# Altium PCB Lite Carrier for Mu.PcbDoc (part 15 of 15)
Units mm, origin at the board's own origin, x right, y up, seen from the top; angles counter-clockwise.
Board outline 146 x 102 mm, 20 copper layers (F.Cu, F.Mask, B.Cu, B.Mask, In1.Cu, F.SilkS, In2.Cu, B.SilkS, F.Adhes, B.Adhes, F.Paste, B.Paste, Dwgs.User, Cmts.User, Eco1.User, Eco2.User, Edge.Cuts, Margin, B.CrtYd, F.CrtYd); 254 components, 382 nets, 1258 pads, 1020 vias.
Unrouted connection lines stored in the file: 113.
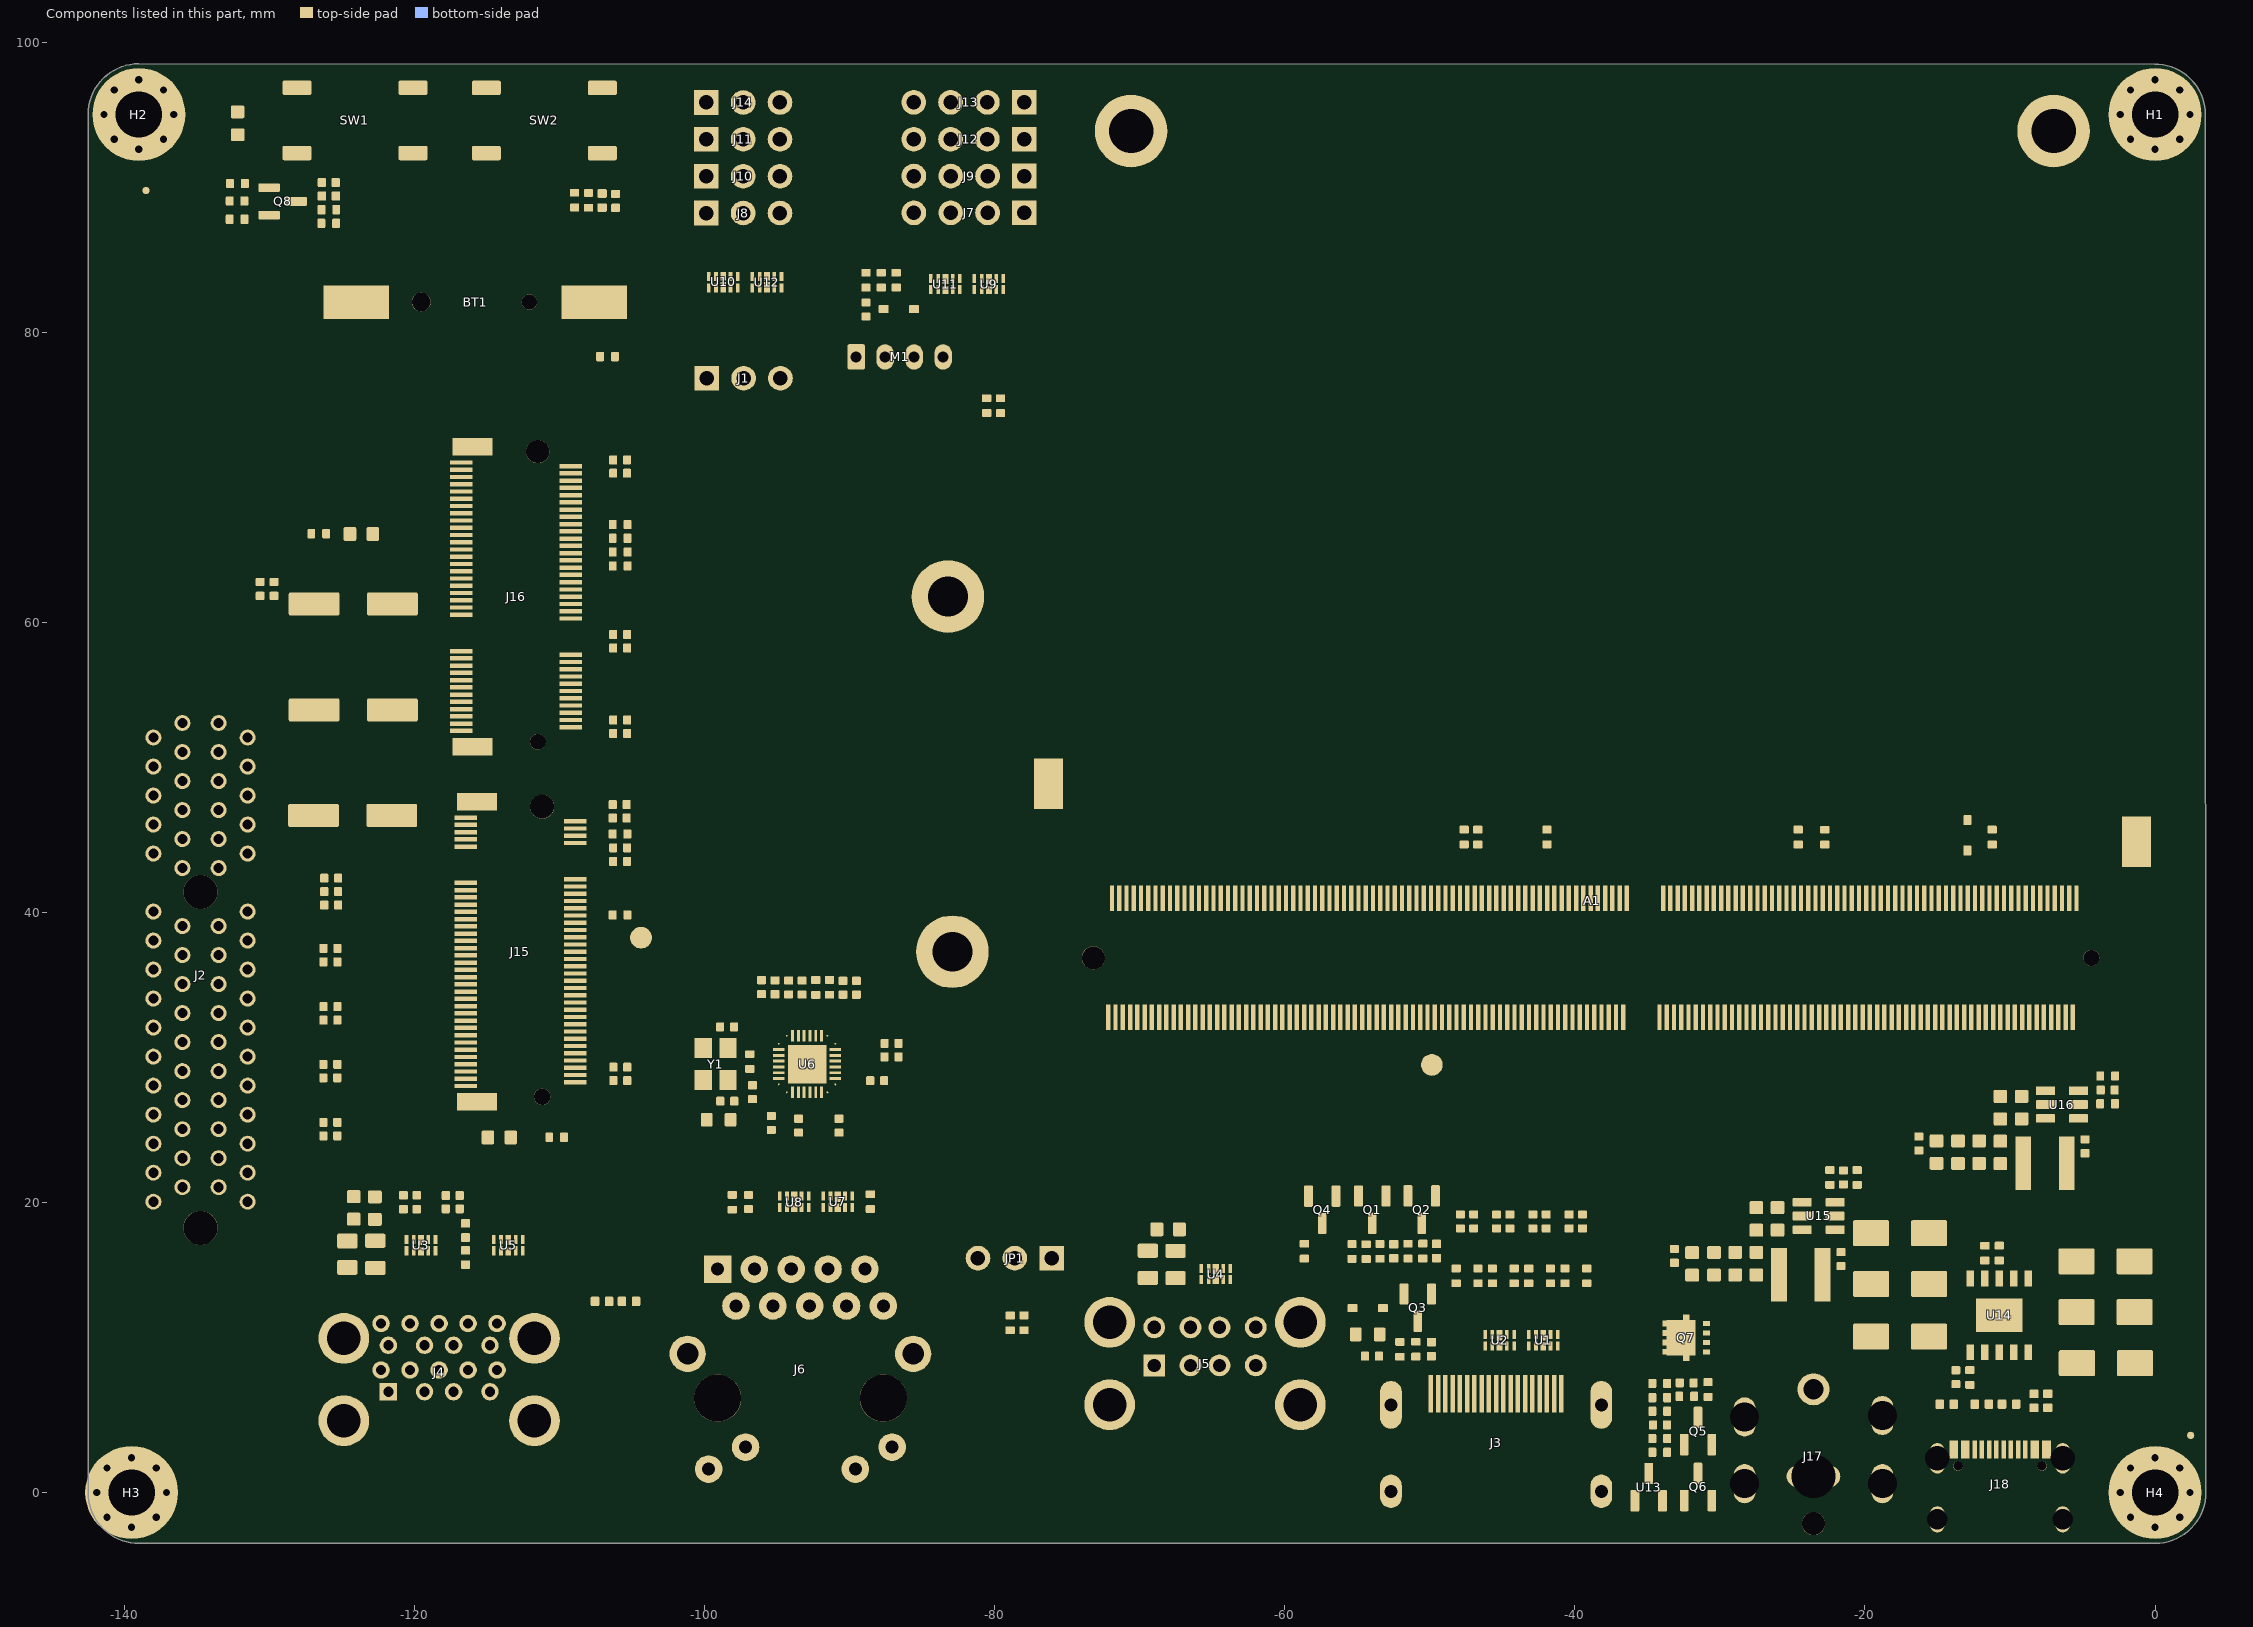
[diagram p25: the components of this part, seen from the top]

## Polygon pours and split planes (outlines as drawn) (continued)
PWR_EN on B.Cu "B.Cu-/PSU/PWR_EN" (solid, remove dead copper, pour order 31010): 24 vertices, not listed, extent -78.693,5.999 -77.307,7.25
Net-(A1-{\B\I\O\S\_\S\E\L\}\)\ on B.Cu "B.Cu-Net-(A1-~{BIOS_SEL})" (solid, remove dead copper, pour order 31013): 24 vertices, not listed, extent -40.601,38.187 -39.39,39.573
Net-(JP1-C) on B.Cu "B.Cu-Net-(JP1-C)-1" (solid, remove dead copper, pour order 31016): 24 vertices, not listed, extent -79.211,14.81 -78.009,16.161
I2C3_SCL on B.Cu "B.Cu-/GPIO/I2C3_SCL-1" (solid, remove dead copper, pour order 31019): 24 vertices, not listed, extent -81.498,89.752 -80.489,90.761
FAN_1_PWM on B.Cu "B.Cu-/Fan_Temp/FAN_1_PWM" (solid, remove dead copper, pour order 31022): 24 vertices, not listed, extent -79.287,74.978 -78.25,76.001
CON_USB3_SSTX_N on B.Cu "B.Cu-/USB2.0&USB3.0/CON_USB3_SSTX_N-1" (solid, remove dead copper, pour order 31025): 24 vertices, not listed, extent -120.937,8.449 -119.876,9.449
CON_USB3_SSTX_P on B.Cu "B.Cu-/USB2.0&USB3.0/CON_USB3_SSTX_P" (solid, remove dead copper, pour order 31028): 24 vertices, not listed, extent -122.53,8.22 -121.462,9.288
HSIO_11_RX- on B.Cu "B.Cu-/LattePanda Module/HSIO_11_RX-" (solid, remove dead copper, pour order 31031): 24 vertices, not listed, extent -131.71,21.84 -130.752,22.863
HSIO_8_RX+ on B.Cu "B.Cu-/LattePanda Module/HSIO_8_RX+" (solid, remove dead copper, pour order 31034): 24 vertices, not listed, extent -132.566,35.542 -131.499,36.558
{\W\A\K\E\}\ on B.Cu "B.Cu-/~{WAKE}-3" (solid, remove dead copper, pour order 31037): 24 vertices, not listed, extent -136.21,42.84 -135.187,43.863
{\P\L\T\_\R\S\T\}\ on B.Cu "B.Cu-/~{PLT_RST}-1" (solid, remove dead copper, pour order 31040): 24 vertices, not listed, extent -133.71,42.237 -132.687,43.26
HSIO_9_RX+ on B.Cu "B.Cu-/LattePanda Module/HSIO_9_RX+" (solid, remove dead copper, pour order 31043): 24 vertices, not listed, extent -133.501,30.542 -132.45,31.558
HSIO_11_RX+ on B.Cu "B.Cu-/LattePanda Module/HSIO_11_RX+" (solid, remove dead copper, pour order 31046): 24 vertices, not listed, extent -133.501,22.542 -132.45,23.558
HSIO_8_RX- on B.Cu "B.Cu-/LattePanda Module/HSIO_8_RX--1" (solid, remove dead copper, pour order 31049): 24 vertices, not listed, extent -133.501,34.542 -132.45,35.558
HSIO_10_RX+ on B.Cu "B.Cu-/LattePanda Module/HSIO_10_RX+" (solid, remove dead copper, pour order 31052): 24 vertices, not listed, extent -133.501,26.542 -132.45,27.558
VPullup on B.Cu "B.Cu-VPullup" (solid, remove dead copper, pour order 31055): 24 vertices, not listed, extent -13.53,46.98 -12.47,48.001
CON_USB3_SSRX_N on B.Cu "B.Cu-/USB2.0&USB3.0/CON_USB3_SSRX_N-1" (solid, remove dead copper, pour order 31058): 24 vertices, not listed, extent -115.24,8.22 -114.299,9.136
CON_USB3_SSRX_P on B.Cu "B.Cu-/USB2.0&USB3.0/CON_USB3_SSRX_P" (solid, remove dead copper, pour order 31061): 24 vertices, not listed, extent -116.53,8.449 -115.643,9.239
HSIO_10_RX- on B.Cu "B.Cu-/LattePanda Module/HSIO_10_RX-" (solid, remove dead copper, pour order 31064): 24 vertices, not listed, extent -132.546,25.661 -131.499,26.558
HSIO_9_RX- on B.Cu "B.Cu-/LattePanda Module/HSIO_9_RX-" (solid, remove dead copper, pour order 31067): 24 vertices, not listed, extent -132.3,29.661 -131.499,30.558
FAN_1_TAC on B.Cu "B.Cu-/Fan_Temp/FAN_1_TAC-1" (solid, remove dead copper, pour order 31070): 24 vertices, not listed, extent -86.652,81.59 -86.059,82.37
+3V3 on B.Cu "B.Cu-+3V3-8" (solid, remove dead copper, pour order 31073): 24 vertices, not listed, extent -2.541,28.579 -2.029,29.091
CC2 on B.Cu "B.Cu-/PSU/CC2" (solid, remove dead copper, pour order 31076): 24 vertices, not listed, extent -9.071,5.709 -8.559,6.221
CC2 on B.Cu "B.Cu-/PSU/CC2-1" (solid, remove dead copper, pour order 31079): 24 vertices, not listed, extent -8.891,13.419 -8.379,13.931
+3V3 on B.Cu "B.Cu-+3V3-6" (solid, remove dead copper, pour order 31082): 24 vertices, not listed, extent -79.326,73.91 -78.942,74.306
+3V3 on B.Cu "B.Cu-+3V3-10" (solid, remove dead copper, pour order 31085): 24 vertices, not listed, extent -53.097,18.459 -52.707,18.91
DDI_B_HPD on B.Cu "B.Cu-/HDMI/DDI_B_HPD-1" (solid, remove dead copper, pour order 31088): 24 vertices, not listed, extent -27.34,30.625 -26.939,30.995
DDI_B_HPD on B.Cu "B.Cu-/HDMI/DDI_B_HPD" (solid, remove dead copper, pour order 31091): 24 vertices, not listed, extent -30.621,30.625 -30.22,30.995
{\C\L\K\R\E\Q\E\}\ on B.Cu "B.Cu-/M.2 E&M Key/~{CLKREQE}-1" (solid, remove dead copper, pour order 31094): 24 vertices, not listed, extent -107.434,63.793 -107.003,64.224
+3V3 on B.Cu "B.Cu-+3V3-9" (solid, remove dead copper, pour order 31097): 24 vertices, not listed, extent -49.954,18.243 -49.523,18.674
{\P\L\T\_\R\S\T\}\ on B.Cu "B.Cu-/~{PLT_RST}" (solid, remove dead copper, pour order 31100): 24 vertices, not listed, extent -111.694,41.123 -111.263,41.554
{\W\A\K\E\}\ on B.Cu "B.Cu-/~{WAKE}-1" (solid, remove dead copper, pour order 31103): 24 vertices, not listed, extent -111.204,41.963 -110.773,42.394
+3V3 on B.Cu "B.Cu-+3V3" (solid, remove dead copper, pour order 31106): 24 vertices, not listed, extent -51.854,15.543 -51.423,15.974
FAN_1_PWM on B.Cu "B.Cu-/Fan_Temp/FAN_1_PWM-1" (solid, remove dead copper, pour order 31109): 24 vertices, not listed, extent -78.635,74.409 -78.265,74.81
Net-(Q7-G) on B.Cu "B.Cu-Net-(Q7-G)" (solid, remove dead copper, pour order 31112): 24 vertices, not listed, extent -31.996,8.199 -31.626,8.6
FAN_1_TAC on B.Cu "B.Cu-/Fan_Temp/FAN_1_TAC-2" (solid, remove dead copper, pour order 31115): 24 vertices, not listed, extent -85.35,82.085 -84.949,82.455
VPullup on B.Cu "B.Cu-VPullup-1" (solid, remove dead copper, pour order 31118): 24 vertices, not listed, extent -13.135,46.979 -12.765,47.38
Net-(A1-{\B\I\O\S\_\S\E\L\}\)\ on B.Cu "B.Cu-Net-(A1-~{BIOS_SEL})-1" (solid, remove dead copper, pour order 31121): 24 vertices, not listed, extent -39.79,38.695 -39.389,39.065
+3V3 on B.Cu "B.Cu-+3V3-4" (solid, remove dead copper, pour order 31124): 24 vertices, not listed, extent -124.99,87.295 -124.589,87.665
+3V3 on B.Cu "B.Cu-+3V3-11" (solid, remove dead copper, pour order 31127): 24 vertices, not listed, extent -109.34,87.285 -108.939,87.655
CC1 on B.Cu "B.Cu-/PSU/CC1-1" (solid, remove dead copper, pour order 31130): 24 vertices, not listed, extent -13.455,6.089 -13.085,6.49
HPD on B.Cu "B.Cu-/HDMI/HPD" (solid, remove dead copper, pour order 31133): 24 vertices, not listed, extent -50.52,8.399 -50.15,8.8
{\W\A\K\E\}\ on B.Cu "B.Cu-/~{WAKE}-2" (solid, remove dead copper, pour order 31136): 24 vertices, not listed, extent -118.47,42.925 -118.069,43.295
Net-(A1-SIO_UART_RX) on B.Cu "B.Cu-Net-(A1-SIO_UART_RX)-1" (solid, remove dead copper, pour order 31139): 24 vertices, not listed, extent -73.37,45.015 -72.969,45.385
+3V3 on B.Cu "B.Cu-+3V3-2" (solid, remove dead copper, pour order 31142): 24 vertices, not listed, extent -53.374,18.246 -52.943,18.677
Net-(Q7-G) on B.Cu "B.Cu-Net-(Q7-G)-1" (solid, remove dead copper, pour order 31145): 24 vertices, not listed, extent -31.264,12.036 -30.833,12.467
PWR_C_D- on B.Cu "B.Cu-/PSU/PWR_C_D-" (solid, remove dead copper, pour order 31148): 24 vertices, not listed, extent -9.104,8.216 -8.673,8.647
+3V3 on B.Cu "B.Cu-+3V3-13" (solid, remove dead copper, pour order 31151): 24 vertices, not listed, extent -23.843,29.794 -23.412,30.225
CC1 on B.Cu "B.Cu-/PSU/CC1" (solid, remove dead copper, pour order 31154): 24 vertices, not listed, extent -10.094,15.446 -9.663,15.877
Net-(JP1-C) on B.Cu "B.Cu-Net-(JP1-C)" (solid, remove dead copper, pour order 31157): 24 vertices, not listed, extent -79.007,12.903 -78.576,13.334
+15V on B.Cu "B.Cu-+15V-4" (solid, remove dead copper, pour order 31160): 24 vertices, not listed, extent -13.667,4.683 -13.236,5.114
+12V on B.Cu "B.Cu-+12V-2" (solid, remove dead copper, pour order 31163): 24 vertices, not listed, extent -35.237,2.676 -34.806,3.106
DDI_B_DDC_SDA on B.Cu "B.Cu-/HDMI/DDI_B_DDC_SDA" (solid, remove dead copper, pour order 31166): 24 vertices, not listed, extent -52.317,17.796 -51.886,18.227
FAN_1_TAC on B.Cu "B.Cu-/Fan_Temp/FAN_1_TAC" (solid, remove dead copper, pour order 31169): 24 vertices, not listed, extent -89.727,82.726 -89.296,83.157
+15V on B.Cu "B.Cu-+15V-5" (solid, remove dead copper, pour order 31172): 24 vertices, not listed, extent -9.087,16.156 -8.656,16.587
+3V3 on B.Cu "B.Cu-+3V3-12" (solid, remove dead copper, pour order 31175): 24 vertices, not listed, extent -131.757,90.736 -131.326,91.167
{\C\L\K\R\E\Q\E\}\ on B.Cu "B.Cu-/M.2 E&M Key/~{CLKREQE}" (solid, remove dead copper, pour order 31178): 24 vertices, not listed, extent -115.081,65.325 -114.68,65.695
+12V on B.Cu "B.Cu-+12V-3" (solid, remove dead copper, pour order 31181): 24 vertices, not listed, extent -32.995,5.442 -32.625,5.843
{\W\A\K\E\}\ on B.Cu "B.Cu-/~{WAKE}" (solid, remove dead copper, pour order 31184): 24 vertices, not listed, extent -118.071,42.925 -117.67,43.295
+3V3 on B.Cu "B.Cu-+3V3-1" (solid, remove dead copper, pour order 31187): 24 vertices, not listed, extent -108.941,87.285 -108.54,87.655
HPD on B.Cu "B.Cu-/HDMI/HPD-1" (solid, remove dead copper, pour order 31190): 24 vertices, not listed, extent -53.145,15.06 -52.775,15.461
PWR_C_D- on B.Cu "B.Cu-/PSU/PWR_C_D--1" (solid, remove dead copper, pour order 31193): 24 vertices, not listed, extent -11.471,6.695 -11.07,7.065
Net-(A1-SIO_UART_TX) on B.Cu "B.Cu-Net-(A1-SIO_UART_TX)-1" (solid, remove dead copper, pour order 31195): 24 vertices, not listed, extent -89.435,62.36 -89.065,62.761
Net-(A1-SIO_UART_RX) on B.Cu "B.Cu-Net-(A1-SIO_UART_RX)" (solid, remove dead copper, pour order 31197): 24 vertices, not listed, extent -88.922,61.748 -88.552,62.149
PWR_EN on B.Cu "B.Cu-/PSU/PWR_EN-1" (solid, remove dead copper, pour order 31199): 24 vertices, not listed, extent -78.185,6.96 -77.815,7.361
+15V on B.Cu "B.Cu-+15V-2" (solid, remove dead copper, pour order 31201): 24 vertices, not listed, extent -12.905,6.54 -12.535,6.941
+3V3 on B.Cu "B.Cu-+3V3-14" (solid, remove dead copper, pour order 31203): 24 vertices, not listed, extent -124.591,87.295 -124.192,87.665
Net-(A1-SIO_UART_TX) on B.Cu "B.Cu-Net-(A1-SIO_UART_TX)" (solid, remove dead copper, pour order 31205): 24 vertices, not listed, extent -73.62,44.493 -73.183,44.914
+15V on B.Cu "B.Cu-+15V-3" (solid, remove dead copper, pour order 31207): 24 vertices, not listed, extent -6.867,5.253 -6.434,5.624
+3V3 on B.Cu "B.Cu-+3V3-5" (solid, remove dead copper, pour order 31209): 24 vertices, not listed, extent -55.545,15.589 -55.175,16.04
HSIO_8_TX+ on B.Cu "B.Cu-/LattePanda Module/HSIO_8_TX+-1" (solid, remove dead copper, pour order 31211): 24 vertices, not listed, extent -63.331,28.911 -62.99,29.281
CON_USB4_D_N on B.Cu "B.Cu-/USB2.0&USB3.0/CON_USB4_D_N" (solid, remove dead copper, pour order 31213): 24 vertices, not listed, extent -115.541,17.148 -115.127,17.526
+BATT on B.Cu "B.Cu-+BATT-1" (solid, remove dead copper, pour order 31215): 24 vertices, not listed, extent -43.855,37.359 -43.485,37.76
I2C3_SCL on B.Cu "B.Cu-/GPIO/I2C3_SCL" (solid, remove dead copper, pour order 31217): 24 vertices, not listed, extent -83.085,84.669 -82.715,85.07
SOC_UART2_RX on B.Cu "B.Cu-/GPIO/SOC_UART2_RX" (solid, remove dead copper, pour order 31219): 24 vertices, not listed, extent -84.86,79.475 -84.459,79.845
SOC_UART0_TX on B.Cu "B.Cu-/GPIO/SOC_UART0_TX-1" (solid, remove dead copper, pour order 31221): 24 vertices, not listed, extent -97.036,84.953 -96.623,85.366
I2C2_SCL on B.Cu "B.Cu-/GPIO/I2C2_SCL-1" (solid, remove dead copper, pour order 31223): 24 vertices, not listed, extent -82.147,84.503 -81.734,84.916
+BATT on B.Cu "B.Cu-+BATT" (solid, remove dead copper, pour order 31225): 24 vertices, not listed, extent -60.287,61.974 -59.874,62.387
SOC_UART2_RX on B.Cu "B.Cu-/GPIO/SOC_UART2_RX-1" (solid, remove dead copper, pour order 31227): 24 vertices, not listed, extent -98.267,80.534 -97.854,80.947
USB_2_P7+ on B.Cu "B.Cu-/LattePanda Module/USB_2_P7+-1" (solid, remove dead copper, pour order 31229): 24 vertices, not listed, extent -105.169,48.708 -104.809,49.049
REFCLK2- on B.Cu "B.Cu-/LattePanda Module/REFCLK2-" (solid, remove dead copper, pour order 31231): 24 vertices, not listed, extent -46.839,35.728 -46.479,36.069
HSIO_2_RX- on B.Cu "B.Cu-/LattePanda Module/HSIO_2_RX--1" (solid, remove dead copper, pour order 31233): 24 vertices, not listed, extent -112.669,37.888 -112.309,38.229
HSIO_3_RX- on B.Cu "B.Cu-/LattePanda Module/HSIO_3_RX--1" (solid, remove dead copper, pour order 31235): 24 vertices, not listed, extent -63.614,42.539 -63.273,42.899
CON_USB4_D_P on B.Cu "B.Cu-/USB2.0&USB3.0/CON_USB4_D_P-1" (solid, remove dead copper, pour order 31237): 24 vertices, not listed, extent -83.529,18.708 -83.169,19.049
HSIO_2_TX- on B.Cu "B.Cu-/LattePanda Module/HSIO_2_TX-" (solid, remove dead copper, pour order 31239): 24 vertices, not listed, extent -101.099,43.588 -100.739,43.929
HSIO_2_TX- on B.Cu "B.Cu-/LattePanda Module/HSIO_2_TX--1" (solid, remove dead copper, pour order 31241): 24 vertices, not listed, extent -65.864,37.349 -65.523,37.709
GbE_PCIe_RX+ on B.Cu "B.Cu-/Gigabit Ethernet/GbE_PCIe_RX+-1" (solid, remove dead copper, pour order 31243): 24 vertices, not listed, extent -89.944,38.639 -89.603,38.999
CON_USB3_D_N on B.Cu "B.Cu-/USB2.0&USB3.0/CON_USB3_D_N" (solid, remove dead copper, pour order 31245): 24 vertices, not listed, extent -106.089,14.329 -105.748,14.689
HSIO_2_RX+ on B.Cu "B.Cu-/LattePanda Module/HSIO_2_RX+" (solid, remove dead copper, pour order 31247): 24 vertices, not listed, extent -99.109,42.388 -98.749,42.729
HSIO_3_TX+ on B.Cu "B.Cu-/LattePanda Module/HSIO_3_TX+" (solid, remove dead copper, pour order 31249): 24 vertices, not listed, extent -64.807,39.159 -64.466,39.519
GbE_PCIe_RX- on B.Cu "B.Cu-/Gigabit Ethernet/GbE_PCIe_RX--1" (solid, remove dead copper, pour order 31251): 24 vertices, not listed, extent -90.387,38.639 -90.046,38.999
HSIO_2_RX+ on B.Cu "B.Cu-/LattePanda Module/HSIO_2_RX+-1" (solid, remove dead copper, pour order 31253): 24 vertices, not listed, extent -112.669,38.331 -112.309,38.672
CON_USB3_D_P on B.Cu "B.Cu-/USB2.0&USB3.0/CON_USB3_D_P" (solid, remove dead copper, pour order 31255): 24 vertices, not listed, extent -106.532,14.329 -106.191,14.689
REFCLK2+ on B.Cu "B.Cu-/LattePanda Module/REFCLK2+-1" (solid, remove dead copper, pour order 31257): 24 vertices, not listed, extent -46.839,36.171 -46.479,36.512
HSIO_2_RX- on B.Cu "B.Cu-/LattePanda Module/HSIO_2_RX-" (solid, remove dead copper, pour order 31259): 24 vertices, not listed, extent -99.109,42.831 -98.749,43.172
CON_USB4_D_N on B.Cu "B.Cu-/USB2.0&USB3.0/CON_USB4_D_N-1" (solid, remove dead copper, pour order 31261): 24 vertices, not listed, extent -83.529,19.151 -83.169,19.492
USB_2_P7- on B.Cu "B.Cu-/LattePanda Module/USB_2_P7--1" (solid, remove dead copper, pour order 31263): 24 vertices, not listed, extent -105.169,49.151 -104.809,49.492
HSIO_3_RX+ on B.Cu "B.Cu-/LattePanda Module/HSIO_3_RX+" (solid, remove dead copper, pour order 31265): 24 vertices, not listed, extent -64.057,42.539 -63.716,42.899
HSIO_2_TX+ on B.Cu "B.Cu-/LattePanda Module/HSIO_2_TX+" (solid, remove dead copper, pour order 31267): 24 vertices, not listed, extent -66.307,37.349 -65.966,37.709
HSIO_2_TX+ on B.Cu "B.Cu-/LattePanda Module/HSIO_2_TX+-1" (solid, remove dead copper, pour order 31269): 24 vertices, not listed, extent -101.099,44.031 -100.739,44.372
HSIO_1_TX+ on B.Cu "B.Cu-/LattePanda Module/HSIO_1_TX+" (solid, remove dead copper, pour order 31271): 24 vertices, not listed, extent -80.859,20.551 -80.499,20.892
HSIO_8_TX- on B.Cu "B.Cu-/LattePanda Module/HSIO_8_TX-" (solid, remove dead copper, pour order 31273): 24 vertices, not listed, extent -119.501,29.372 -119.141,29.713
HSIO_11_TX- on B.Cu "B.Cu-/LattePanda Module/HSIO_11_TX-" (solid, remove dead copper, pour order 31275): 24 vertices, not listed, extent -58.364,28.921 -58.023,29.281
HSIO_3_RX+ on B.Cu "B.Cu-/LattePanda Module/HSIO_3_RX+-1" (solid, remove dead copper, pour order 31277): 24 vertices, not listed, extent -76.841,55.968 -76.481,56.309
HSIO_11_RX- on B.Cu "B.Cu-/LattePanda Module/HSIO_11_RX--1" (solid, remove dead copper, pour order 31279): 24 vertices, not listed, extent -57.614,36.031 -57.273,36.391
GbE_PCIe_RX+ on B.Cu "B.Cu-/Gigabit Ethernet/GbE_PCIe_RX+" (solid, remove dead copper, pour order 31281): 24 vertices, not listed, extent -80.339,44.261 -79.998,44.621
HSIO_10_RX- on B.Cu "B.Cu-/LattePanda Module/HSIO_10_RX--1" (solid, remove dead copper, pour order 31283): 24 vertices, not listed, extent -59.114,36.031 -58.773,36.391
HSIO_9_RX- on B.Cu "B.Cu-/LattePanda Module/HSIO_9_RX--1" (solid, remove dead copper, pour order 31285): 24 vertices, not listed, extent -60.614,36.031 -60.273,36.391
CON_USB3_D_P on B.Cu "B.Cu-/USB2.0&USB3.0/CON_USB3_D_P-1" (solid, remove dead copper, pour order 31287): 24 vertices, not listed, extent -84.481,17.428 -84.121,17.769
HSIO_10_TX- on B.Cu "B.Cu-/LattePanda Module/HSIO_10_TX--1" (solid, remove dead copper, pour order 31289): 24 vertices, not listed, extent -59.864,28.921 -59.523,29.281
HSIO_3_TX+ on B.Cu "B.Cu-/LattePanda Module/HSIO_3_TX+-1" (solid, remove dead copper, pour order 31291): 24 vertices, not listed, extent -76.831,54.388 -76.471,54.729
HSIO_9_TX- on B.Cu "B.Cu-/LattePanda Module/HSIO_9_TX-" (solid, remove dead copper, pour order 31293): 24 vertices, not listed, extent -120.601,27.972 -120.241,28.313
REFCLK2- on B.Cu "B.Cu-/LattePanda Module/REFCLK2--1" (solid, remove dead copper, pour order 31295): 24 vertices, not listed, extent -120.081,38.522 -119.721,38.863
USB_2_P7+ on B.Cu "B.Cu-/LattePanda Module/USB_2_P7+" (solid, remove dead copper, pour order 31297): 24 vertices, not listed, extent -115.011,52.868 -114.651,53.209
CON_USB4_D_P on B.Cu "B.Cu-/USB2.0&USB3.0/CON_USB4_D_P" (solid, remove dead copper, pour order 31299): 24 vertices, not listed, extent -115.541,16.742 -115.181,17.083
HSIO_10_TX- on B.Cu "B.Cu-/LattePanda Module/HSIO_10_TX-" (solid, remove dead copper, pour order 31301): 24 vertices, not listed, extent -122.401,24.958 -122.041,25.299
HSIO_1_TX- on B.Cu "B.Cu-/LattePanda Module/HSIO_1_TX--1" (solid, remove dead copper, pour order 31303): 24 vertices, not listed, extent -115.431,19.628 -115.071,19.969
HSIO_8_RX- on B.Cu "B.Cu-/LattePanda Module/HSIO_8_RX-" (solid, remove dead copper, pour order 31305): 24 vertices, not listed, extent -62.114,36.031 -61.773,36.391
CON_USB3_SSRX_N on B.Cu "B.Cu-/USB2.0&USB3.0/CON_USB3_SSRX_N" (solid, remove dead copper, pour order 31307): 24 vertices, not listed, extent -114.229,15.131 -113.888,15.491
HSIO_3_TX- on B.Cu "B.Cu-/LattePanda Module/HSIO_3_TX--1" (solid, remove dead copper, pour order 31309): 24 vertices, not listed, extent -64.364,39.159 -64.023,39.519
HSIO_1_TX- on B.Cu "B.Cu-/LattePanda Module/HSIO_1_TX-" (solid, remove dead copper, pour order 31311): 24 vertices, not listed, extent -80.859,20.108 -80.499,20.449
HSIO_3_TX- on B.Cu "B.Cu-/LattePanda Module/HSIO_3_TX-" (solid, remove dead copper, pour order 31313): 24 vertices, not listed, extent -76.831,54.831 -76.471,55.172
HSIO_9_TX+ on B.Cu "B.Cu-/LattePanda Module/HSIO_9_TX+" (solid, remove dead copper, pour order 31315): 24 vertices, not listed, extent -120.601,28.415 -120.241,28.756
HSIO_10_TX+ on B.Cu "B.Cu-/LattePanda Module/HSIO_10_TX+" (solid, remove dead copper, pour order 31317): 24 vertices, not listed, extent -60.307,28.921 -59.966,29.281
HSIO_10_TX+ on B.Cu "B.Cu-/LattePanda Module/HSIO_10_TX+-1" (solid, remove dead copper, pour order 31319): 24 vertices, not listed, extent -122.401,25.401 -122.041,25.742
CON_USB3_SSRX_P on B.Cu "B.Cu-/USB2.0&USB3.0/CON_USB3_SSRX_P-1" (solid, remove dead copper, pour order 31321): 24 vertices, not listed, extent -114.672,15.131 -114.331,15.491
HSIO_9_RX+ on B.Cu "B.Cu-/LattePanda Module/HSIO_9_RX+-1" (solid, remove dead copper, pour order 31323): 24 vertices, not listed, extent -61.057,36.031 -60.716,36.391
HSIO_1_TX+ on B.Cu "B.Cu-/LattePanda Module/HSIO_1_TX+-1" (solid, remove dead copper, pour order 31325): 24 vertices, not listed, extent -115.431,20.071 -115.071,20.412
HSIO_11_TX+ on B.Cu "B.Cu-/LattePanda Module/HSIO_11_TX+" (solid, remove dead copper, pour order 31327): 24 vertices, not listed, extent -58.807,28.921 -58.466,29.281
HSIO_11_RX+ on B.Cu "B.Cu-/LattePanda Module/HSIO_11_RX+-1" (solid, remove dead copper, pour order 31329): 24 vertices, not listed, extent -58.057,36.031 -57.716,36.391
GbE_PCIe_RX- on B.Cu "B.Cu-/Gigabit Ethernet/GbE_PCIe_RX-" (solid, remove dead copper, pour order 31331): 24 vertices, not listed, extent -80.782,44.261 -80.441,44.621
HSIO_10_RX+ on B.Cu "B.Cu-/LattePanda Module/HSIO_10_RX+-1" (solid, remove dead copper, pour order 31333): 24 vertices, not listed, extent -59.557,36.031 -59.216,36.391
REFCLK2+ on B.Cu "B.Cu-/LattePanda Module/REFCLK2+" (solid, remove dead copper, pour order 31335): 24 vertices, not listed, extent -120.081,38.965 -119.721,39.306
USB_2_P7- on B.Cu "B.Cu-/LattePanda Module/USB_2_P7-" (solid, remove dead copper, pour order 31337): 24 vertices, not listed, extent -115.011,53.311 -114.651,53.652
HSIO_3_RX- on B.Cu "B.Cu-/LattePanda Module/HSIO_3_RX-" (solid, remove dead copper, pour order 31339): 24 vertices, not listed, extent -76.841,56.411 -76.481,56.752
HSIO_8_TX+ on B.Cu "B.Cu-/LattePanda Module/HSIO_8_TX+" (solid, remove dead copper, pour order 31341): 24 vertices, not listed, extent -119.501,29.815 -119.141,30.156
CON_USB3_D_N on B.Cu "B.Cu-/USB2.0&USB3.0/CON_USB3_D_N-1" (solid, remove dead copper, pour order 31343): 24 vertices, not listed, extent -84.481,17.871 -84.121,18.212
HSIO_8_RX+ on B.Cu "B.Cu-/LattePanda Module/HSIO_8_RX+-1" (solid, remove dead copper, pour order 31345): 24 vertices, not listed, extent -62.557,36.031 -62.216,36.391
HSIO_9_TX+ on B.Cu "B.Cu-/LattePanda Module/HSIO_9_TX+-1" (solid, remove dead copper, pour order 31347): 24 vertices, not listed, extent -61.807,28.921 -61.466,29.281
CON_USB3_SSTX_P on B.Cu "B.Cu-/USB2.0&USB3.0/CON_USB3_SSTX_P-1" (solid, remove dead copper, pour order 31349): 24 vertices, not listed, extent -120.692,15.451 -120.351,15.811
GbE_PCIe_CLK- on B.Cu "B.Cu-/Gigabit Ethernet/GbE_PCIe_CLK-" (solid, remove dead copper, pour order 31351): 24 vertices, not listed, extent -65.181,38.471 -64.821,38.812
GbE_PCIe_CLK+ on B.Cu "B.Cu-/Gigabit Ethernet/GbE_PCIe_CLK+" (solid, remove dead copper, pour order 31353): 24 vertices, not listed, extent -49.485,42.787 -49.111,43.183
GbE_PCIe_CLK- on B.Cu "B.Cu-/Gigabit Ethernet/GbE_PCIe_CLK--1" (solid, remove dead copper, pour order 31355): 24 vertices, not listed, extent -49.293,43.001 -48.897,43.375
REFCLK0- on B.Cu "B.Cu-/LattePanda Module/REFCLK0-" (solid, remove dead copper, pour order 31357): 24 vertices, not listed, extent -49.409,38.767 -49.035,39.163
CON_USB3_SSTX_N on B.Cu "B.Cu-/USB2.0&USB3.0/CON_USB3_SSTX_N" (solid, remove dead copper, pour order 31359): 24 vertices, not listed, extent -120.249,15.451 -119.908,15.811
HSIO_9_TX- on B.Cu "B.Cu-/LattePanda Module/HSIO_9_TX--1" (solid, remove dead copper, pour order 31361): 24 vertices, not listed, extent -61.364,28.921 -61.023,29.281
GbE_PCIe_CLK+ on B.Cu "B.Cu-/Gigabit Ethernet/GbE_PCIe_CLK+-1" (solid, remove dead copper, pour order 31363): 24 vertices, not listed, extent -65.181,38.028 -64.821,38.369
HSIO_0_TX- on B.Cu "B.Cu-/LattePanda Module/HSIO_0_TX--1" (solid, remove dead copper, pour order 31365): 24 vertices, not listed, extent -118.931,21.528 -118.571,21.869
REFCLK0+ on B.Cu "B.Cu-/LattePanda Module/REFCLK0+" (solid, remove dead copper, pour order 31367): 24 vertices, not listed, extent -60.191,47.788 -59.831,48.129
HSIO_0_TX+ on B.Cu "B.Cu-/LattePanda Module/HSIO_0_TX+" (solid, remove dead copper, pour order 31369): 24 vertices, not listed, extent -79.879,21.971 -79.519,22.312
HSIO_0_TX- on B.Cu "B.Cu-/LattePanda Module/HSIO_0_TX-" (solid, remove dead copper, pour order 31371): 24 vertices, not listed, extent -79.879,21.528 -79.519,21.869
REFCLK0+ on B.Cu "B.Cu-/LattePanda Module/REFCLK0+-1" (solid, remove dead copper, pour order 31373): 24 vertices, not listed, extent -49.623,38.981 -49.227,39.355
REFCLK0- on B.Cu "B.Cu-/LattePanda Module/REFCLK0--1" (solid, remove dead copper, pour order 31375): 24 vertices, not listed, extent -60.191,48.231 -59.831,48.572
HSIO_0_TX+ on B.Cu "B.Cu-/LattePanda Module/HSIO_0_TX+-1" (solid, remove dead copper, pour order 31377): 24 vertices, not listed, extent -118.931,21.971 -118.571,22.312
HSIO_8_TX- on B.Cu "B.Cu-/LattePanda Module/HSIO_8_TX--1" (solid, remove dead copper, pour order 31379): 24 vertices, not listed, extent -62.873,28.941 -62.499,29.281
+3V3 on In2.Cu "In2.Cu-+3V3-2" (solid, remove dead copper, pour order 30978): -121.67,65.46 -118.39,65.46 -118.39,63.32 -121.67,63.32
+3V3 on In2.Cu "In2.Cu-+3V3-8" (solid, remove dead copper, pour order 30980): -128.57,43.76 -138.68,43.74 -138.67,46.93 -124.45,46.93 -124.47,65.44 -118.39,65.46 -118.39,63.32 -121.5,63.39 -121.57,43.82
+3V3 on In2.Cu "In2.Cu-+3V3" (solid, remove dead copper, pour order 30982): -105.59,38.54 -105.59,37.54 -106.59,37.54 -106.59,38.54
+3V3 on In2.Cu "In2.Cu-+3V3-1" (solid, remove dead copper, pour order 30983): -91.19,38.73 -91.19,37.73 -92.19,37.73 -92.19,38.73
{\P\W\R\_\L\E\D\}\{\s\l\a\s\h\}\{PSON} on In2.Cu "In2.Cu-/~{PWR_LED}{slash}~{PSON}" (solid, remove dead copper, pour order 30987): 24 vertices, not listed, extent -76.422,14.886 -74.796,16.512
Net-(A1-SIO_UART_TX) on In2.Cu "In2.Cu-Net-(A1-SIO_UART_TX)-1" (solid, remove dead copper, pour order 30991): 24 vertices, not listed, extent -100.202,75.546 -98.576,77.172
LED2_ACT on In2.Cu "In2.Cu-/Gigabit Ethernet/LED2_ACT-1" (solid, remove dead copper, pour order 30994): 24 vertices, not listed, extent -90.277,1.609 -88.933,3.06
LED1_1000 on In2.Cu "In2.Cu-/Gigabit Ethernet/LED1_1000-1" (solid, remove dead copper, pour order 30997): 24 vertices, not listed, extent -100.793,1.609 -99.714,2.688
Net-(A1-SIO_UART_RX) on In2.Cu "In2.Cu-Net-(A1-SIO_UART_RX)" (solid, remove dead copper, pour order 31000): 24 vertices, not listed, extent -97.911,75.47 -96.709,76.821
GND on In2.Cu "In2.Cu-GND-1" (solid, remove dead copper, pour order 31003): 24 vertices, not listed, extent -119.382,7.896 -118.299,8.874
SUSCLK_WIFI on In2.Cu "In2.Cu-/LattePanda Module/SUSCLK_WIFI" (solid, remove dead copper, pour order 31006): 24 vertices, not listed, extent -104.521,45.883 -104.109,46.361
SUSCLK_WIFI on In2.Cu "In2.Cu-/LattePanda Module/SUSCLK_WIFI-4" (solid, remove dead copper, pour order 31009): 24 vertices, not listed, extent -40.024,37.643 -39.593,38.074
Net-(A1-{\B\I\O\S\_\S\E\L\}\)\ on In2.Cu "In2.Cu-Net-(A1-~{BIOS_SEL})-1" (solid, remove dead copper, pour order 31012): 24 vertices, not listed, extent -39.744,38.803 -39.313,39.234
+3V3 on In2.Cu "In2.Cu-+3V3-6" (solid, remove dead copper, pour order 31015): 24 vertices, not listed, extent -88.934,27.466 -88.503,27.896
{\P\L\T\_\R\S\T\}\ on In2.Cu "In2.Cu-/~{PLT_RST}-2" (solid, remove dead copper, pour order 31018): 24 vertices, not listed, extent -111.694,41.123 -111.263,41.554
FAN_1_PWM on In2.Cu "In2.Cu-/Fan_Temp/FAN_1_PWM-1" (solid, remove dead copper, pour order 31021): 24 vertices, not listed, extent -71.345,43.549 -70.975,43.95
SUSCLK_WIFI on In2.Cu "In2.Cu-/LattePanda Module/SUSCLK_WIFI-3" (solid, remove dead copper, pour order 31024): 24 vertices, not listed, extent -74.85,48.425 -74.449,48.795
PWR_EN on In2.Cu "In2.Cu-/PSU/PWR_EN-2" (solid, remove dead copper, pour order 31027): 24 vertices, not listed, extent -32.85,0.645 -32.449,1.015
PWR_EN on In2.Cu "In2.Cu-/PSU/PWR_EN-4" (solid, remove dead copper, pour order 31030): 24 vertices, not listed, extent -24.565,21.059 -24.195,21.46
PWR_EN on In2.Cu "In2.Cu-/PSU/PWR_EN" (solid, remove dead copper, pour order 31033): 24 vertices, not listed, extent -7.94,28.545 -7.539,28.915
Net-(A1-SIO_UART_TX) on In2.Cu "In2.Cu-Net-(A1-SIO_UART_TX)" (solid, remove dead copper, pour order 31036): 24 vertices, not listed, extent -89.435,62.759 -89.065,63.16
Net-(A1-SIO_UART_RX) on In2.Cu "In2.Cu-Net-(A1-SIO_UART_RX)-1" (solid, remove dead copper, pour order 31039): 24 vertices, not listed, extent -88.922,62.147 -88.552,62.548
VPullup on In2.Cu "In2.Cu-VPullup-1" (solid, remove dead copper, pour order 31042): 24 vertices, not listed, extent -28.25,46.195 -27.849,46.565
+3V3 on In2.Cu "In2.Cu-+3V3-9" (solid, remove dead copper, pour order 31045): 24 vertices, not listed, extent -50.07,12.649 -49.7,13.05
+3V3 on In2.Cu "In2.Cu-+3V3-3" (solid, remove dead copper, pour order 31048): 24 vertices, not listed, extent -97.27,24.305 -96.869,24.675
PWR_EN on In2.Cu "In2.Cu-/PSU/PWR_EN-5" (solid, remove dead copper, pour order 31051): 24 vertices, not listed, extent -32.527,0.753 -32.096,1.184
+3V3 on In2.Cu "In2.Cu-+3V3-7" (solid, remove dead copper, pour order 31054): 24 vertices, not listed, extent -51.746,9.676 -51.316,10.106
FAN_1_TAC on In2.Cu "In2.Cu-/Fan_Temp/FAN_1_TAC-1" (solid, remove dead copper, pour order 31057): 24 vertices, not listed, extent -71.147,42.683 -70.716,43.114
VPullup on In2.Cu "In2.Cu-VPullup" (solid, remove dead copper, pour order 31060): 24 vertices, not listed, extent -40.917,44.613 -40.486,45.044
{\W\A\K\E\}\ on In2.Cu "In2.Cu-/~{WAKE}-3" (solid, remove dead copper, pour order 31063): 24 vertices, not listed, extent -74.754,47.376 -74.323,47.807
{\P\W\R\_\L\E\D\}\{\s\l\a\s\h\}\{PSON} on In2.Cu "In2.Cu-/~{PWR_LED}{slash}~{PSON}-1" (solid, remove dead copper, pour order 31066): 24 vertices, not listed, extent -58.989,15.196 -58.558,15.627
{\P\L\T\_\R\S\T\}\ on In2.Cu "In2.Cu-/~{PLT_RST}-5" (solid, remove dead copper, pour order 31069): 24 vertices, not listed, extent -112.174,63.906 -111.743,64.337
{\W\A\K\E\}\ on In2.Cu "In2.Cu-/~{WAKE}-1" (solid, remove dead copper, pour order 31072): 24 vertices, not listed, extent -46.747,34.493 -46.316,34.924
SUSCLK_WIFI on In2.Cu "In2.Cu-/LattePanda Module/SUSCLK_WIFI-2" (solid, remove dead copper, pour order 31075): 24 vertices, not listed, extent -102.647,64.566 -102.216,64.997
SUSCLK_WIFI on In2.Cu "In2.Cu-/LattePanda Module/SUSCLK_WIFI-5" (solid, remove dead copper, pour order 31078): 24 vertices, not listed, extent -59.047,42.776 -58.616,43.207
FAN_1_PWM on In2.Cu "In2.Cu-/Fan_Temp/FAN_1_PWM" (solid, remove dead copper, pour order 31081): 24 vertices, not listed, extent -78.527,74.056 -78.096,74.487
FAN_1_TAC on In2.Cu "In2.Cu-/Fan_Temp/FAN_1_TAC" (solid, remove dead copper, pour order 31084): 24 vertices, not listed, extent -77.037,74.746 -76.606,75.177
+3V3 on In2.Cu "In2.Cu-+3V3-10" (solid, remove dead copper, pour order 31087): 24 vertices, not listed, extent -51.577,15.266 -51.146,15.697
{\W\A\K\E\}\ on In2.Cu "In2.Cu-/~{WAKE}-2" (solid, remove dead copper, pour order 31090): 24 vertices, not listed, extent -59.877,42.206 -59.446,42.637
PWR_EN on In2.Cu "In2.Cu-/PSU/PWR_EN-3" (solid, remove dead copper, pour order 31093): 24 vertices, not listed, extent -24.565,20.66 -24.195,21.061
SUSCLK_WIFI on In2.Cu "In2.Cu-/LattePanda Module/SUSCLK_WIFI-1" (solid, remove dead copper, pour order 31096): 24 vertices, not listed, extent -81.151,48.425 -80.75,48.795
PWR_EN on In2.Cu "In2.Cu-/PSU/PWR_EN-1" (solid, remove dead copper, pour order 31099): 24 vertices, not listed, extent -78.185,6.96 -77.815,7.361
+3V3 on In2.Cu "In2.Cu-+3V3-5" (solid, remove dead copper, pour order 31102): 24 vertices, not listed, extent -50.07,12.25 -49.7,12.651
Net-(A1-{\B\I\O\S\_\S\E\L\}\)\ on In2.Cu "In2.Cu-Net-(A1-~{BIOS_SEL})" (solid, remove dead copper, pour order 31105): 24 vertices, not listed, extent -42.105,42.47 -41.735,42.871
+3V3 on In2.Cu "In2.Cu-+3V3-4" (solid, remove dead copper, pour order 31108): 24 vertices, not listed, extent -105.801,24.305 -105.4,24.675
{\W\A\K\E\}\ on In2.Cu "In2.Cu-/~{WAKE}" (solid, remove dead copper, pour order 31111): 24 vertices, not listed, extent -103.551,42.049 -103.16,42.388
{\R\S\T\_\S\W\}\ on In2.Cu "In2.Cu-/LattePanda Module/~{RST_SW}-1" (solid, remove dead copper, pour order 31114): 24 vertices, not listed, extent -71.805,34.817 -71.436,35.218
SOC_UART1_RX on In2.Cu "In2.Cu-/GPIO/SOC_UART1_RX" (solid, remove dead copper, pour order 31117): 24 vertices, not listed, extent -63.25,75.965 -62.849,76.335
SOC_UART0_TX on In2.Cu "In2.Cu-/GPIO/SOC_UART0_TX" (solid, remove dead copper, pour order 31120): 24 vertices, not listed, extent -65.03,76.445 -64.629,76.815
I2C4_SCL on In2.Cu "In2.Cu-/GPIO/I2C4_SCL-1" (solid, remove dead copper, pour order 31123): 24 vertices, not listed, extent -60.346,75.933 -59.933,76.346
SOC_UART1_TX on In2.Cu "In2.Cu-/GPIO/SOC_UART1_TX" (solid, remove dead copper, pour order 31126): 24 vertices, not listed, extent -60.486,74.533 -60.073,74.946
I2C3_SCL on In2.Cu "In2.Cu-/GPIO/I2C3_SCL-1" (solid, remove dead copper, pour order 31129): 24 vertices, not listed, extent -59.416,76.583 -59.003,76.996
{\P\L\T\_\R\S\T\}\ on In2.Cu "In2.Cu-/~{PLT_RST}-4" (solid, remove dead copper, pour order 31132): 24 vertices, not listed, extent -51.556,29.413 -51.143,29.826
I2C2_SCL on In2.Cu "In2.Cu-/GPIO/I2C2_SCL-1" (solid, remove dead copper, pour order 31135): 24 vertices, not listed, extent -58.386,77.273 -57.973,77.686
SOC_UART0_RX on In2.Cu "In2.Cu-/GPIO/SOC_UART0_RX" (solid, remove dead copper, pour order 31138): 24 vertices, not listed, extent -63.176,72.403 -62.763,72.816
{\P\W\R\_\S\W\}\ on In2.Cu "In2.Cu-/LattePanda Module/~{PWR_SW}" (solid, remove dead copper, pour order 31141): 24 vertices, not listed, extent -123.561,88.245 -123.16,88.615
I2C4_SCL on In2.Cu "In2.Cu-/GPIO/I2C4_SCL" (solid, remove dead copper, pour order 31144): 24 vertices, not listed, extent -84.085,81.66 -83.715,82.061
SOC_UART1_RX on In2.Cu "In2.Cu-/GPIO/SOC_UART1_RX-1" (solid, remove dead copper, pour order 31147): 24 vertices, not listed, extent -99.211,81.905 -98.81,82.275
{\P\L\T\_\R\S\T\}\ on In2.Cu "In2.Cu-/~{PLT_RST}" (solid, remove dead copper, pour order 31150): 24 vertices, not listed, extent -91.971,33.165 -91.57,33.535
I2C2_SCL on In2.Cu "In2.Cu-/GPIO/I2C2_SCL" (solid, remove dead copper, pour order 31153): 24 vertices, not listed, extent -82.121,81.865 -81.72,82.235
{\R\S\T\_\S\W\}\ on In2.Cu "In2.Cu-/LattePanda Module/~{RST_SW}" (solid, remove dead copper, pour order 31156): 24 vertices, not listed, extent -103.365,81.69 -102.995,82.091
{\P\L\T\_\R\S\T\}\ on In2.Cu "In2.Cu-/~{PLT_RST}-1" (solid, remove dead copper, pour order 31159): 24 vertices, not listed, extent -111.417,40.864 -111.004,41.277
LED1_1000 on In2.Cu "In2.Cu-/Gigabit Ethernet/LED1_1000" (solid, remove dead copper, pour order 31162): 24 vertices, not listed, extent -95.827,29.964 -95.414,30.377
I2C3_SCL on In2.Cu "In2.Cu-/GPIO/I2C3_SCL" (solid, remove dead copper, pour order 31165): 24 vertices, not listed, extent -82.977,81.704 -82.564,82.117
SOC_UART0_RX on In2.Cu "In2.Cu-/GPIO/SOC_UART0_RX-1" (solid, remove dead copper, pour order 31168): 24 vertices, not listed, extent -100.317,81.874 -99.904,82.287
{\P\W\R\_\L\E\D\}\{\s\l\a\s\h\}\{PSON} on In2.Cu "In2.Cu-/~{PWR_LED}{slash}~{PSON}-3" (solid, remove dead copper, pour order 31171): 24 vertices, not listed, extent -71.477,71.534 -71.064,71.947
SOC_UART2_TX on In2.Cu "In2.Cu-/GPIO/SOC_UART2_TX-1" (solid, remove dead copper, pour order 31174): 24 vertices, not listed, extent -95.213,81.716 -94.8,82.128
SOC_UART1_TX on In2.Cu "In2.Cu-/GPIO/SOC_UART1_TX-1" (solid, remove dead copper, pour order 31177): 24 vertices, not listed, extent -96.253,81.799 -95.839,82.21
{\P\L\T\_\R\S\T\}\ on In2.Cu "In2.Cu-/~{PLT_RST}-3" (solid, remove dead copper, pour order 31180): 24 vertices, not listed, extent -92.155,33.349 -91.785,33.774
SOC_UART2_TX on In2.Cu "In2.Cu-/GPIO/SOC_UART2_TX" (solid, remove dead copper, pour order 31183): 24 vertices, not listed, extent -91.562,78.073 -91.143,78.477
SOC_UART0_TX on In2.Cu "In2.Cu-/GPIO/SOC_UART0_TX-1" (solid, remove dead copper, pour order 31186): 24 vertices, not listed, extent -96.797,81.326 -96.396,81.747
LED2_ACT on In2.Cu "In2.Cu-/Gigabit Ethernet/LED2_ACT" (solid, remove dead copper, pour order 31189): 24 vertices, not listed, extent -96.135,30.509 -95.74,30.879
{\P\W\R\_\L\E\D\}\{\s\l\a\s\h\}\{PSON} on In2.Cu "In2.Cu-/~{PWR_LED}{slash}~{PSON}-2" (solid, remove dead copper, pour order 31192): 24 vertices, not listed, extent -70.641,34.819 -70.3,35.172
GND on In2.Cu "In2.Cu-GND" (solid, remove dead copper, pour order 32170): -142.495,-3.491 3.445,-3.461 3.435,98.539 -142.555,98.539
GND on In1.Cu "In1.Cu-GND-1" (solid, remove dead copper, pour order 30986): 24 vertices, not listed, extent -118.301,8.026 -117.284,9.05
GND on In1.Cu "In1.Cu-GND" (solid, remove dead copper, pour order 30990): 24 vertices, not listed, extent -118.301,7.896 -117.246,8.874
GND on In1.Cu "In1.Cu-GND-2" (solid, remove dead copper, pour order 32169): -142.495,-3.491 3.445,-3.461 3.435,98.539 -142.555,98.539

## Keep-outs
F.Cu:
  region: -118.75,40.06 -118.84,25.15 -121.82,21.8 -129.52,21.81 -129.53,18.1 -135.14,18.07 -139.33,18.07 -139.08,40.07
  region: -15.157,28.203 -20.321,22.445 -23.152,22.454 -15.165,32.76
  region: -37.074,23.267 -37.127,10.197 -40.188,4.967 -40.254,23.301
B.Cu:
  region: -121.88,26.37 -123.56,26.37 -128.83,21.28 -134.7,21.27 -134.7,37.12 -121.86,37.12

## Other copper
F.SilkS:
  text "3V3" at -105.85,94.212 h1.5
  text "3V3" at -91.2,94.182 h1.5
  text "RST" at -116.123,92.48 h1.5 r90
  text "PWR" at -129.018,92.1 h1.5 r90
  text "GND" at -105.97,91.673 h1.5
  text "GND" at -91.55,91.653 h1.5
  text "SCL" at -91.4,89.303 h1.5
  text "TX" at -105.03,89.234 h1.5
  text "RX" at -104.98,86.734 h1.5
  text "SDA" at -91.44,86.743 h1.5
  text "2" at -78.85,84.489 h1.5
  text "5" at -86.51,84.456 h1.5
  text "4" at -83.89,84.449 h1.5
  text "3" at -81.24,84.442 h1.5
  text "1" at -98.11,84.294 h1.5
  text "0" at -100.74,84.282 h1.5
  text "2" at -95.45,84.289 h1.5
  text "RX" at -98.63,78.363 h1
  text "TX" at -101.12,78.343 h1
  text "GND" at -96.33,78.305 h1
  text "CR1220" at -126.801,77.42 h1.5 r90
  text "CPU_FAN" at -89.88,73.347 h1
  text "Debug_Uart" at -101.99,73.201 h1
  text "LatttePanda Mu" at -47.94,72.696 h1.5
  text "PCIe PWR" at -128.62,66.754 h1
  text "M.2 E KEY" at -102.77,60.114 h1.5
  text "PCIe Slot is Only  / Available When Using  / 12V DC Power Input." at -129.845,57.26 h1.5 r90
  text "M.2 M KEY" at -102.57,37.204 h1.5
  text "Primer Carrier for LattePanda Mu V1.0" at -84.59,23.568 h2
  text "SSD" at -115.74,21.755 h1
  text "~{SLP}" at -82.6,17.721 h1
  text "~{PSON}" at -78.57,17.711 h1
  text "PWR_EN" at -81.67,12.721 h1
  text "PCIe x4" at -139.85,12.351 h1.5
  text "USB2.0" at -74.311,-2.52 h1.5 r90
  text "ETH" at -103.264,-2.89 h1.5 r90
  text "HDMI" at -54.134,-2.9 h1.5 r90
  text "PD 15V" at -3.006,-2.99 h1.5 r90
  text "12V" at -15.534,-3.03 h1.5 r90
  text "USB3.0" at -127.681,-3.08 h1.5 r90
B.SilkS:
  text "100" at -132.61,-3.205 h1

## Silkscreen, mask and mechanical layers (free items; w line width, h text height)
User.5:
  text "FAN_TAC" at -87.92,80.824 h0.8
  text "FAN_PWM" at -72.25,75.106 h0.8
  text "VPULL" at -8.06,47.215 h0.8
  text "BIOSSEL" at -38.34,36.322 h0.8
  text "3V3" at -16.67,25.462 h0.8
  text "12VA" at -33.64,21.553 h0.8
  text "5V" at -36.39,14.324 h0.8
  text "12V" at -24.96,9.333 h0.8
  text "VDC" at 2.74,4.422 h0.8
  text "PWR_EN" at -75.63,3.117 h0.8
  text "15V" at -2.91,2.364 h0.8
User.4:
  text "PLT_RST" at -52.35,27.054 h0.8

## Dimensions
-142.5,95 to 3.475,94.975 on User.3
-139,95 to -139,0 on User.3
-139,95 to -0.025,94.975 on User.3
-139,98.5 to -139,-3.5 on User.3

## Text inside footprints (layer, text, board x,y; h text height)
A1: Cmts.User "M2x5.5 SMT nuts x2" at -13.79,86.574 h1
J3: Dwgs.User "PCB Edge" at -46.548,-2.578 h1